# Altium PCB 175-00024_rev1, Backplane, 19-inch Rack_OLD.PcbDoc (part 3 of 3)
Units mil, origin at the board's own origin, x right, y up, seen from the top; angles counter-clockwise.
Board outline 8400 x 10183.07 mil, 7 copper layers (Top Layer (*.GTL), Mid-Layer 1, +24V, RTN, +12V, Signal GND, Bottom Layer); 183 components, 151 nets, 1419 pads, 357 vias.
Unrouted connection lines stored in the file: 135.
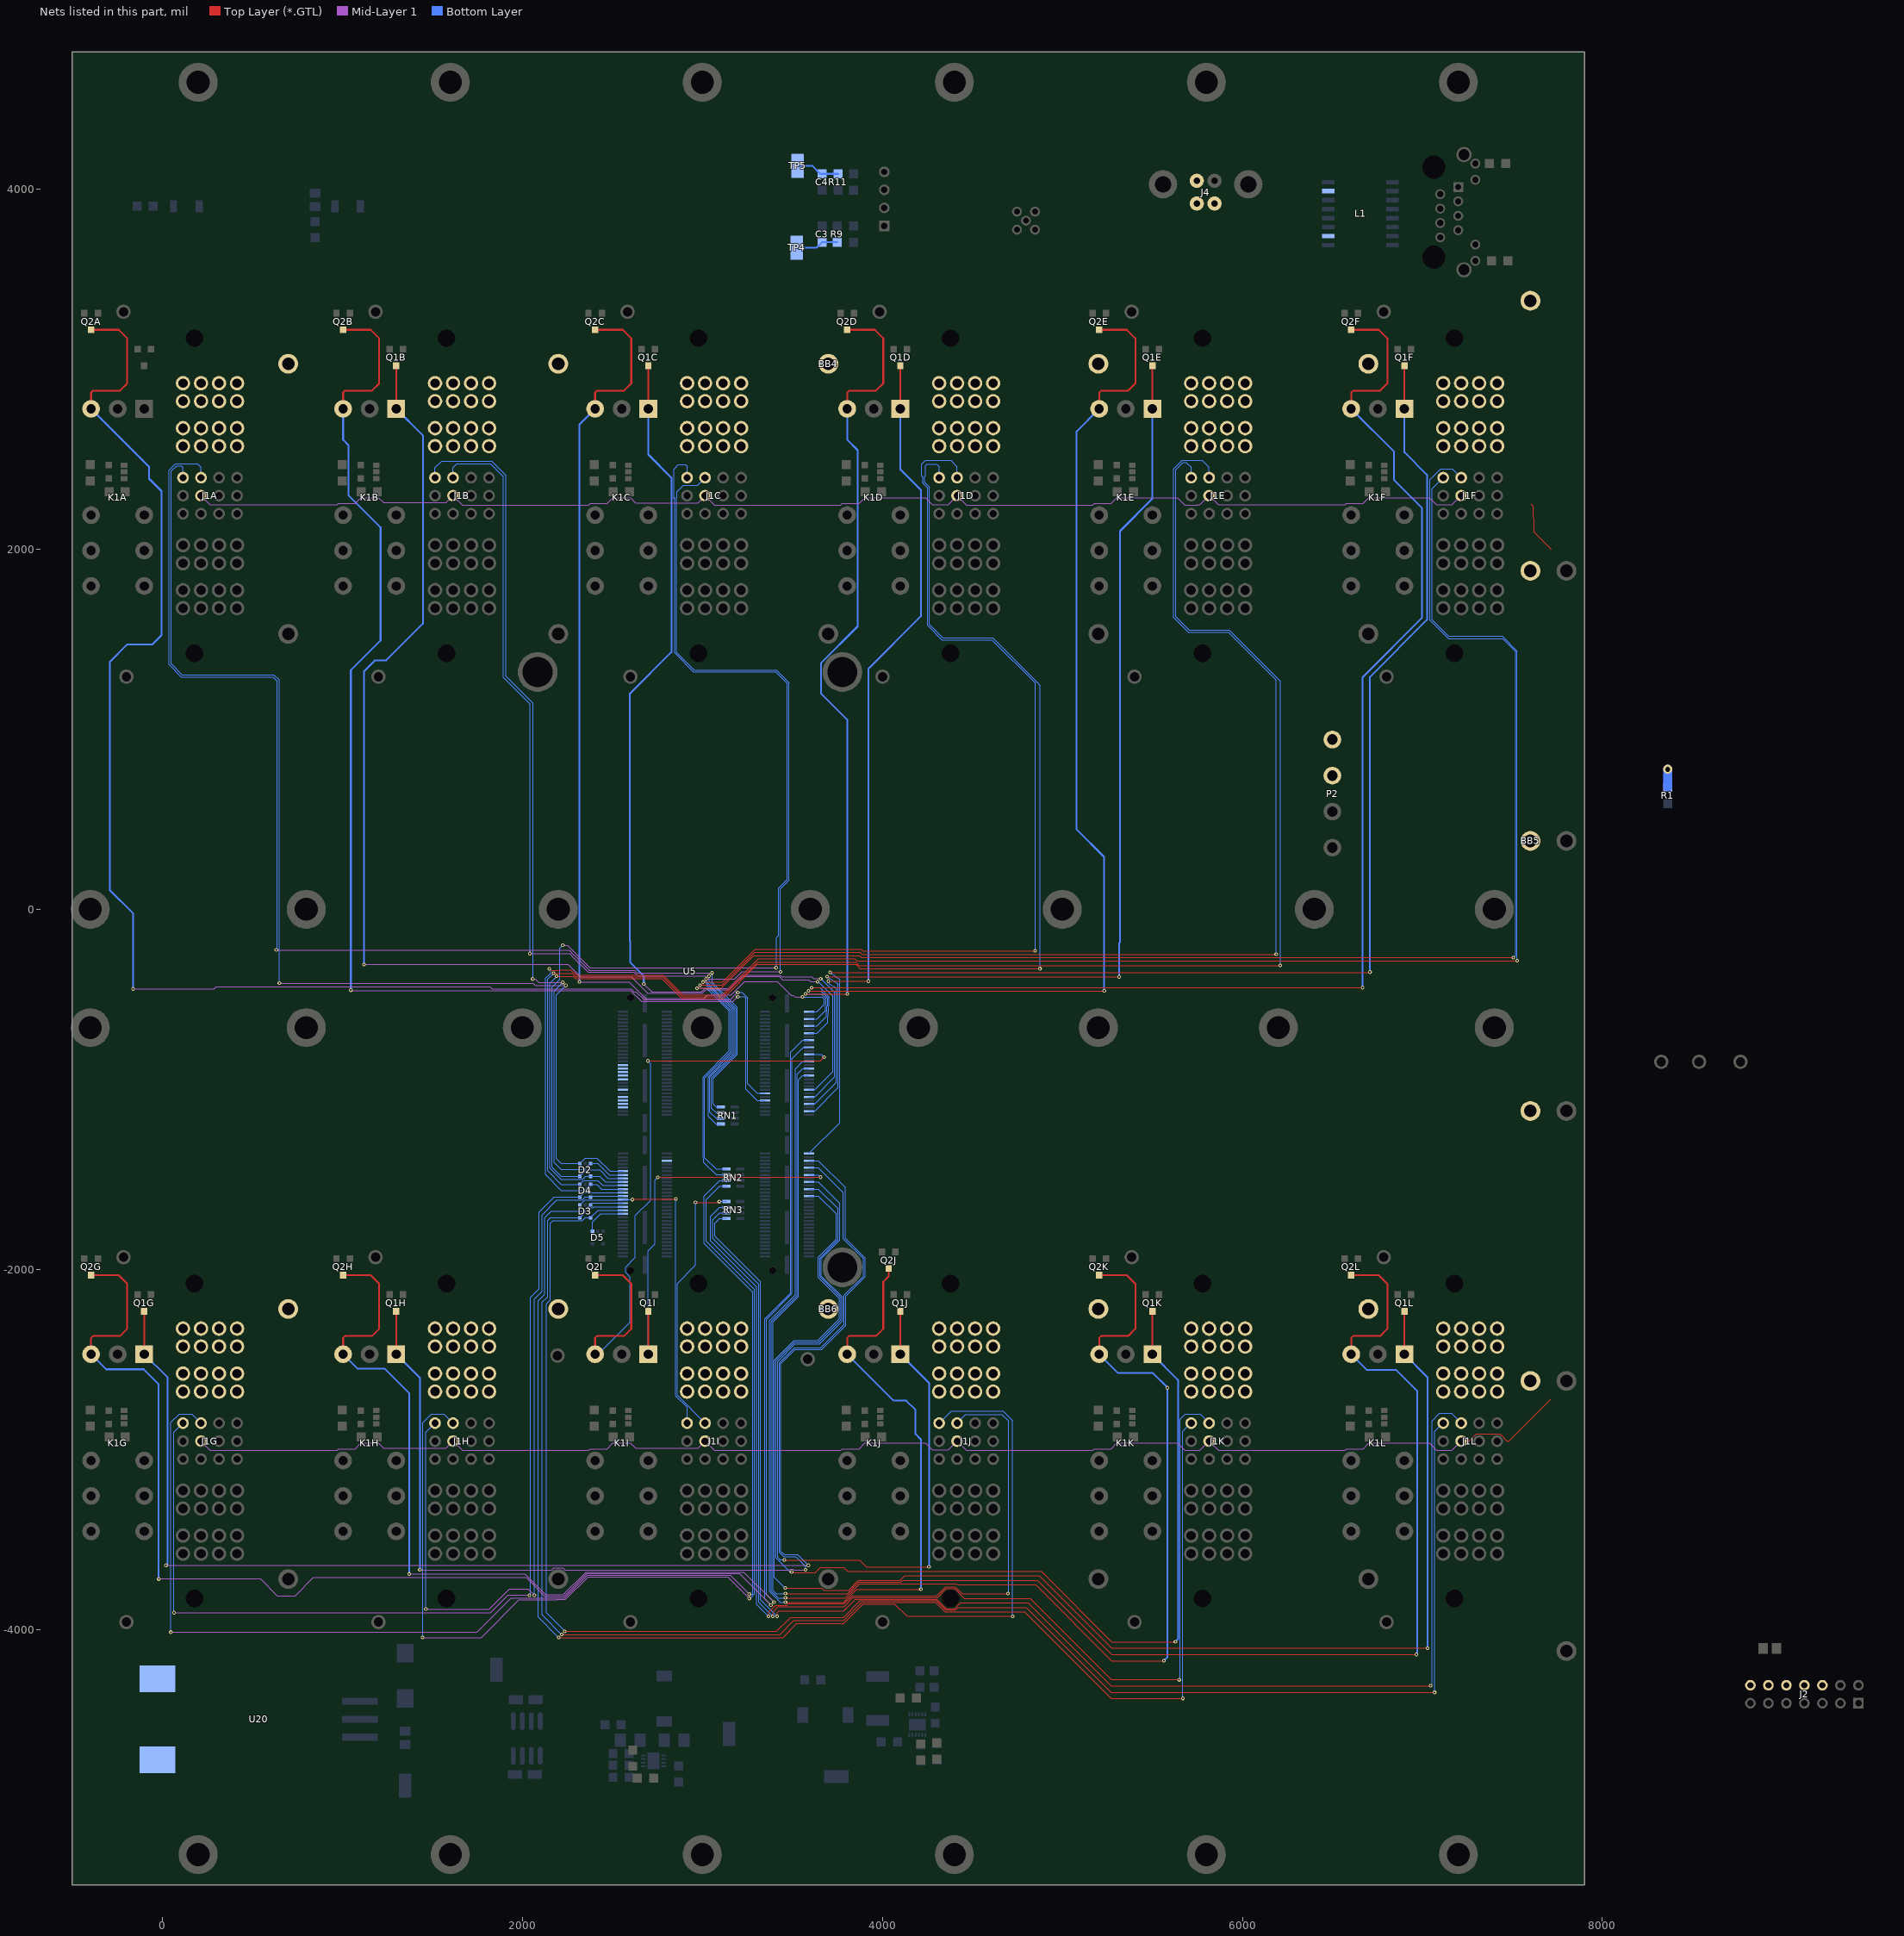
[diagram p8: the nets of this part, all layers, seen from the top]

## Via types
v1: diameter 20, hole 10, Top Layer (*.GTL) to Bottom Layer, 213 vias
v2: diameter 50, hole 28, Top Layer (*.GTL) to Bottom Layer, 87 vias
v3: diameter 24, hole 10, Top Layer (*.GTL) to Bottom Layer, 50 vias
v4: diameter 25.98, hole 12.99, Top Layer (*.GTL) to Bottom Layer, tented top, 4 vias
v5: diameter 30, hole 15, Top Layer (*.GTL) to Bottom Layer, 3 vias

## Nets (pads, with @x,y where several pads share a name; then routed paths per layer and width w, separated by ;. In a path a pad name is that pad's centre, name@x,y a point inside that pad or via, vN(x,y) a via of type N, cw(c..) or ccw(c..) an arc to the next point about the centre after c; other vN are vias at no path point) (continued)
PWR_OFF2: K1B.1 Q1B.3 U5.B46 | length 6906.3
  Top Layer (*.GTL) w10: K1B.1@1300,2779.92 Q1B.3@1300,3018.66
  Mid-Layer 1 w5: v1@1121,-306 2138.94,-306 2139.44,-305.5 2160.56,-305.5 2161.06,-306 2254.18,-306 2324.18,-376 2605.18,-376 2696.18,-467 2999.82,-467 3018.82,-448 3149.48,-448 3223.48,-374 3428.18,-374 3446.33,-392.15 3590.85,-392.15 3600.97,-402.26 v1(3641.24,-402.26)
  Bottom Layer w5: U5.B46@3592.59,-1002.72 3624,-1002.72 3725,-901.72 3725,-482.36 3644.9,-402.26 v1(3641.24,-402.26)
  Bottom Layer w10: v1(1121,-307) 1121,1321 1183,1383 1244,1383 1448,1587 1448,2631.92 K1B.1@1300,2779.92
PWR_OFF3: K1C.1 Q1C.3 U5.B50 | length 5430.4
  Top Layer (*.GTL) w10: K1C.1@2700,2779.92 Q1C.3@2700,3018.66
  Mid-Layer 1 w5: v1(2675,-415) 2717,-457 ; 2717,-458 2996.09,-458 3015.09,-439 3145.75,-439 3219.75,-365 3431.91,-365 3442.46,-375.54 3442.82,-375.18 3607.82,-375.18 3617.94,-385.29 v1(3658.21,-385.29)
  Mid-Layer 1 w10: v1@2675,-416.91 v1(2675,-415)
  Bottom Layer w5: U5.B50@3592.59,-1042.09 3624,-1042.09 3735,-931.09 3735,-462.09 v1(3658.21,-385.29)
  Bottom Layer w10: v1(2675,-415) 2675,-371 2600,-296 2600,-177 2598,-175 2598,1198 2829,1429 2829,2397 2700,2526 K1C.1@2700,2779.92
PWR_OFF4: K1D.1 Q1D.3 U5.B54 | length 4596.5
  Top Layer (*.GTL) w5: v1@3700,-398.32 v1@3923,-398.32
  Top Layer (*.GTL) w10: K1D.1@4100,2779.92 Q1D.3@4100,3018.66
  Bottom Layer w5: U5.B54@3592.59,-1081.46 3624,-1081.46 3745,-960.46 3745,-438.15 3704.14,-414.5 v1(3700,-399)
  Bottom Layer w10: v1(3923,-399) 3923,1336 4214,1627 4214,2330 4100,2444 K1D.1@4100,2779.92
PWR_OFF5: K1E.1 Q1E.3 U5.B58 | length 5958
  Top Layer (*.GTL) w5: v1(3693.15,-374.35) v1@5315,-374.35
  Top Layer (*.GTL) w10: K1E.1@5500,2779.92 Q1E.3@5500,3018.66
  Bottom Layer w5: U5.B58@3592.59,-1120.83 3624,-1120.83 3755,-989.83 3755,-414.21 v1(3693.15,-374.35)
  Bottom Layer w10: v1(5315,-375) 5315,-188.13 5320,-183.13 5320,2100 5500,2280 K1E.1@5500,2779.92
PWR_OFF6: K1F.1 Q1F.3 U5.B62 | length 7657.1
  Top Layer (*.GTL) w5: v1(3709.12,-350.38) v1@6709,-350.38
  Top Layer (*.GTL) w10: K1F.1@6900,2779.92 Q1F.3@6900,3018.66
  Bottom Layer w5: U5.B62@3592.59,-1357.05 3764,-1185.63 3764,-389.26 v1(3709.12,-350.38)
  Bottom Layer w10: v1(6709,-349) 6709,1291 7026,1608 7026,2413 6900,2539 K1F.1@6900,2779.92
PWR_OFF7: K1G.1 Q1G.3 U5.B66 | length 7830.7
  Top Layer (*.GTL) w10: K1G.1@-100.01,-2471.26 Q1G.3@-100.01,-2232.52
  Mid-Layer 1 w5: v1(21,-3644) v1(3589,-3644)
  Bottom Layer w5: v1(3589,-3644) 3529,-3584 3454,-3584 3437,-3567 3437,-2524 3516,-2445 3662.71,-2445 3797.5,-2310.21 3797.5,-2147.67 3904.15,-2041.02 3904.15,-1936.86 3794,-1826.71 3794,-1545.42 3645,-1396.42 U5.B66@3592.59,-1396.42
  Bottom Layer w10: K1G.1@-100.01,-2471.26 30,-2601.27 30,-3635 v1(21,-3644)
PWR_OFF8: K1H.1 Q1H.3 U5.B70 | length 6415.1
  Top Layer (*.GTL) w10: K1H.1@1299.99,-2471.26 Q1H.3@1299.99,-2232.52
  Mid-Layer 1 w5: v1(1431,-3669) 2164.1,-3669 2174.53,-3658.58 2225.47,-3658.58 2235.9,-3669 3484.67,-3669 3489.17,-3664.5 3502.83,-3664.5 3507.33,-3669 v1(3574,-3669)
  Bottom Layer w5: v1(3574,-3669) 3574,-3653.83 3572.5,-3652.33 3572.5,-3649.5 3520,-3597 3452,-3597 3428,-3573 3428,-2520.27 3513.27,-2435 3658.57,-2435 3788.5,-2305.07 3788.5,-2143.94 3895.15,-2037.29 3895.15,-1940.58 3784,-1829.43 3784,-1574.79 3645,-1435.79 U5.B70@3592.59,-1435.79
  Bottom Layer w10: K1H.1@1299.99,-2471.26 1432,-2603.27 1432,-3668 v1(1431,-3669)
PWR_OFF9: K1I.1 Q1I.3 U5.B74 | length 2218.9
  Top Layer (*.GTL) w5: v1(2753,-1489) 3657,-1489 v1(3658,-1488)
  Top Layer (*.GTL) w10: K1I.1@2699.99,-2471.26 Q1I.3@2699.99,-2232.52
  Bottom Layer w5: K1I.1@2699.99,-2471.26 2699.99,-1896.69 2737.5,-1859.17 2737.5,-1504.5 v1(2753,-1489) ; U5.B74@3592.59,-1475.16 3645,-1475.16 ; 3645.16,-1475.16 v1(3658,-1488)
PWR_OFF10: K1J.1 Q1J.3 U5.B78 | length 4853.6
  Top Layer (*.GTL) w5: v1(3456,-3614) 3874.09,-3614 3912.36,-3652.27 v1@4259,-3652.27
  Top Layer (*.GTL) w10: K1J.1@4099.99,-2471.26 Q1J.3@4099.99,-2232.52
  Bottom Layer w5: v1(3456,-3614) 3454,-3612 3432,-3612 3419,-3599 3419,-2512 3516,-2415 3650.28,-2415 3779.5,-2285.78 3779.5,-2155.11 3661.68,-2037.29 3661.68,-1940.58 3764,-1838.26 3764,-1633.53 3645,-1514.53 U5.B78@3592.59,-1514.53
  Bottom Layer w10: K1J.1@4099.99,-2471.26 4260,-2631.27 4260,-3651 v1(4259,-3652)
PWR_OFF11: K1K.1 Q1K.3 U5.B82 | length 6800.8
  Top Layer (*.GTL) w5: v1(3496,-3681) 3500.5,-3685.5 3626.5,-3685.5 3656,-3656 3785,-3656 3806.27,-3677.27 4882.54,-3677.27 5274.26,-4069 v1@5628,-4069
  Top Layer (*.GTL) w10: K1K.1@5499.99,-2471.26 Q1K.3@5499.99,-2232.52
  Bottom Layer w5: v1(3496,-3681) 3488.27,-3681 3410,-3602.73 3410,-2508.27 3513.27,-2405 3646.14,-2405 3770.5,-2280.64 3770.5,-2158.84 3652.68,-2041.02 3652.68,-1936.86 3754,-1835.53 3754,-1662.9 3645,-1553.9 U5.B82@3592.59,-1553.9
  Bottom Layer w10: K1K.1@5499.99,-2471.26 5643,-2614.27 5643,-4053 v1(5628,-4068)
PWR_OFF12: K1L.1 Q1L.3 U5.B86 | length 8309.1
  Top Layer (*.GTL) w5: v1(3461,-3770) 3662.95,-3770 3674.53,-3781.58 3812.78,-3781.58 3865.92,-3728.44 4099.38,-3728.44 4125.54,-3702.27 4872.18,-3702.27 5273.91,-4104 v1@7029,-4104
  Top Layer (*.GTL) w10: K1L.1@6899.99,-2471.26 Q1L.3@6899.99,-2232.52
  Bottom Layer w5: v1(3461,-3770) 3401,-3710 3401,-2504.54 3510.54,-2395 3642,-2395 3761.5,-2275.5 3761.5,-2162.57 3643.68,-2044.75 3643.68,-1933.13 3744,-1832.8 3744,-1692.27 3645,-1593.27 U5.B86@3592.59,-1593.27
  Bottom Layer w10: K1L.1@6899.99,-2471.26 7029,-2600.27 7029,-4103 v1(7028,-4104)
PWR_ON1: K1A.2 Q2A.3 U5.B47 | length 8496
  Top Layer (*.GTL) w10: K1A.2@-395.28,2779.92 -395.28,2870.29 -384.5,2881.06 -234.5,2881.06 -194.5,2921.06 -194.5,3171.06 -242.1,3218.66 Q2A.3@-395,3218.66
  Mid-Layer 1 w5: v1@-162,-442.48 288.29,-442.48 299.77,-431 1821.39,-431 1832.88,-442.48 2605.17,-442.48 2620.69,-458 2632,-458 2677,-503 3155.96,-503 v1@3189.96,-469 ; v1@3190,-469 v1(3197,-462)
  Bottom Layer w5: v1(3197,-462) 3221.73,-462 3251,-491.27 3251,-969.4 3304,-1022.4 U5.B47@3349.28,-1022.4
  Bottom Layer w10: K1A.2@-395.28,2779.92 -73,2457.65 -73,2392 -4,2323 -4,1522.6 -56.6,1470 -195.6,1470 -291,1374.6 -291,106 -161,-24 -161,-441 v1(-162,-442)
PWR_ON2: K1B.2 Q2B.3 U5.B51 | length 7037.2
  Top Layer (*.GTL) w10: K1B.2@1004.72,2779.92 1004.72,2870.29 1015.5,2881.06 1165.5,2881.06 1205.5,2921.06 1205.5,3171.06 1157.9,3218.66 Q2B.3@1005,3218.66
  Mid-Layer 1 w5: v1@1048,-451.48 2601.44,-451.48 2661.96,-512 3171,-512 v1(3197,-486)
  Bottom Layer w5: v1(3197,-486) 3233,-486 3241,-494 3241,-998.77 3304,-1061.77 U5.B51@3349.28,-1061.77
  Bottom Layer w10: K1B.2@1004.72,2779.92 1004.72,2608.28 1034,2579 1034,2300 1213,2121 1213,1493 1048,1328 v1(1048,-449)
PWR_ON3: K1C.2 Q2C.3 U5.B2 | length 5615.1
  Top Layer (*.GTL) w10: K1C.2@2404.72,2779.92 2404.72,2870.29 2415.5,2881.06 2565.5,2881.06 2605.5,2921.06 2605.5,3171.06 2557.9,3218.66 Q2C.3@2405,3218.66
  Mid-Layer 1 w5: v1@2313,-403 v1(2317,-403) 2594,-403 2685,-494 3011,-494 3030,-475 3160.67,-475 3234.67,-401 3417,-401 3493,-477 3506,-477 3516.12,-487.12 v1(3556.38,-487.12)
  Bottom Layer w5: v1(3556.38,-487.12) 3666.12,-487.12 3678,-499 3678,-527.65 3636,-569.65 U5.B2@3592.59,-569.65
  Bottom Layer w10: v1(2317,-403) 2317,-49.11 2317.27,-48.84 2317.27,48.57 2317,48.84 2317,2692.2 K1C.2@2404.72,2779.92
PWR_ON4: K1D.2 Q2D.3 U5.B6 | length 4735.2
  Top Layer (*.GTL) w5: v1(3573.35,-470.15) v1@3805,-470.15
  Top Layer (*.GTL) w10: K1D.2@3804.72,2779.92 3804.72,2870.29 3815.5,2881.06 3965.5,2881.06 4005.5,2921.06 4005.5,3171.06 3957.9,3218.66 Q2D.3@3805,3218.66
  Bottom Layer w5: v1(3573.35,-470.15) 3661.87,-470.15 3687,-495.27 3687,-531.37 3684,-534.37 3684,-561.02 3636,-609.02 U5.B6@3592.59,-609.02
  Bottom Layer w10: K1D.2@3804.72,2779.92 3804.72,2608.28 3862.94,2550.07 3862.94,1571.3 3659.18,1367.54 3659.18,1198.91 3804.72,1053.37 3804.72,-469.72 v1(3805,-470)
PWR_ON5: K1E.2 Q2E.3 U5.B10 | length 6119.5
  Top Layer (*.GTL) w5: v1(3590.32,-453.18) v1@5232,-453.18
  Top Layer (*.GTL) w10: K1E.2@5204.72,2779.92 5204.72,2870.29 5215.5,2881.06 5365.5,2881.06 5405.5,2921.06 5405.5,3171.06 5357.9,3218.66 Q2E.3@5205,3218.66
  Bottom Layer w5: v1(3590.32,-453.18) 3657.63,-453.18 3696,-491.54 3696,-535.1 3693,-538.1 3693,-564.74 3690,-567.74 3690,-594.39 3636,-648.39 U5.B10@3592.59,-648.39
  Bottom Layer w10: K1E.2@5204.72,2779.92 5079,2654.2 5079,444 5232,291 5232,-452 v1(5233,-453)
PWR_ON6: K1F.2 Q2F.3 U5.B14 | length 7749
  Top Layer (*.GTL) w5: v1(3607.29,-436.21) v1@6668,-436.21
  Top Layer (*.GTL) w10: K1F.2@6604.72,2779.92 6604.72,2870.29 6615.5,2881.06 6765.5,2881.06 6805.5,2921.06 6805.5,3171.06 6757.9,3218.66 Q2F.3@6605,3218.66
  Bottom Layer w5: U5.B14@3592.59,-687.76 3636,-687.76 3696,-627.76 3696,-601.11 3699,-598.11 3699,-571.47 3702,-568.47 3702,-541.83 3705,-538.83 3705,-487.82 3653.39,-436.21 v1(3607.29,-436.21)
  Bottom Layer w10: K1F.2@6604.72,2779.92 6843,2541.65 6843,2384 6998.5,2228.5 6998.5,1619.76 6668,1289.26 v1(6668,-435)
PWR_ON7: K1G.2 Q2G.3 U5.B18 | length 9232.5
  Top Layer (*.GTL) w10: K1G.2@-395.29,-2471.26 -395.29,-2380.89 -384.51,-2370.12 -234.51,-2370.12 -194.51,-2330.12 -194.51,-2080.12 -242.11,-2032.52 Q2G.3@-395.01,-2032.52
  Mid-Layer 1 w5: v1@-19,-3719 544.27,-3719 639.27,-3814 738,-3814 840,-3712 2021.27,-3712 2125.27,-3816 2232,-3816 2358,-3690 3206.06,-3690 v1(3381.03,-3864.97)
  Bottom Layer w5: v1(3381.03,-3864.97) 3347,-3830.94 3347,-2274 3490.03,-2130.97 3490.03,-795.09 3558,-727.13 U5.B18@3592.59,-727.13
  Bottom Layer w10: K1G.2@-395.29,-2471.26 -311.55,-2555 -103,-2555 -20,-2638 -20,-3719 v1(-19,-3720)
PWR_ON8: K1H.2 Q2H.3 U5.B22 | length 7656.4
  Top Layer (*.GTL) w10: K1H.2@1004.71,-2471.26 1004.71,-2380.89 1015.49,-2370.12 1165.49,-2370.12 1205.49,-2330.12 1205.49,-2080.12 1157.89,-2032.52 Q2H.3@1004.99,-2032.52
  Mid-Layer 1 w5: v1(1372,-3692) 2014,-3692 2129,-3807 2228.27,-3807 2354.27,-3681 3231,-3681 v1(3398,-3848)
  Bottom Layer w5: v1(3398,-3848) 3356,-3806 3356,-2277.73 3499.03,-2134.7 3499.03,-829.02 3558,-770.05 3558,-766.5 U5.B22@3592.59,-766.5
  Bottom Layer w10: K1H.2@1004.71,-2471.26 1085.45,-2552 1236,-2552 1373,-2689 1373,-3691 v1(1372,-3692)
PWR_ON9: K1I.2 Q2I.3 U5.B26 | length 3653.5
  Top Layer (*.GTL) w5: v1(2697,-842) 3655,-842 v1(3676,-821)
  Top Layer (*.GTL) w10: K1I.2@2404.71,-2471.26 2404.71,-2380.89 2415.49,-2370.12 2565.49,-2370.12 2605.49,-2330.12 2605.49,-2080.12 2557.89,-2032.52 Q2I.3@2404.99,-2032.52
  Bottom Layer w5: K1I.2@2404.71,-2471.26 2422.02,-2471.26 2598.5,-2294.78 2598.5,-2041.89 2573.88,-2017.27 2573.88,-1987.44 2628.28,-1933.04 2628.28,-1701.86 2712.5,-1617.64 2712.5,-857.5 v1(2697,-842) ; U5.B26@3592.59,-805.87 3660.87,-805.87 v1(3676,-821)
PWR_ON10: K1J.2 Q2J.3 U5.B30 | length 6128.5
  Top Layer (*.GTL) w5: v1(3462,-3849) 3785,-3849 3857,-3777 v1(4214,-3777) v1@4215,-3776
  Top Layer (*.GTL) w10: K1J.2@3804.71,-2471.26 3804.71,-2380.89 3815.49,-2370.12 3965.49,-2370.12 4005.49,-2330.12 4005.49,-2068.95 4035.5,-2038.94 Q2J.3@4035.5,-1995.2
  Bottom Layer w5: v1(3462,-3849) 3432.54,-3849 3374,-3790.46 3374,-2285.18 3517.03,-2142.15 3517.03,-886.2 3558,-845.24 U5.B30@3592.59,-845.24
  Bottom Layer w10: K1J.2@3804.71,-2471.26 4062.45,-2729 4133,-2729 4184,-2780 4184,-2914 4215,-2945 4215,-3776 v1(4214,-3777)
PWR_ON11: K1K.2 Q2K.3 U5.B34 | length 8181
  Top Layer (*.GTL) w5: v1(3462,-3825) 3794.82,-3825 3873.38,-3746.44 4412.67,-3746.44 4418.51,-3752.27 4851.47,-3752.27 5273.2,-4174 v1(5564,-4174)
  Top Layer (*.GTL) w10: K1K.2@5204.71,-2471.26 5204.71,-2380.89 5215.49,-2370.12 5365.49,-2370.12 5405.49,-2330.12 5405.49,-2080.12 5357.89,-2032.52 Q2K.3@5204.99,-2032.52
  Bottom Layer w5: v1(3462,-3825) 3421.27,-3825 3383,-3786.73 3383,-2288.91 3526.03,-2145.88 3526.03,-916.57 3558,-884.61 U5.B34@3592.59,-884.61
  Bottom Layer w10: K1K.2@5204.71,-2471.26 5309.45,-2576 5503,-2576 v1@5584,-2657 ; v1(5564,-4174) 5584,-4154 v1@5584,-2657 ; v1(5583,-2658) v1@5584,-2657
PWR_ON12: K1L.2 Q2L.3 U5.B38 | length 9448.6
  Top Layer (*.GTL) w5: v1(3462,-3801) 3806.09,-3801 3869.65,-3737.44 4103.11,-3737.44 4113.27,-3727.27 4861.83,-3727.27 5273.55,-4139 v1@6971,-4139
  Top Layer (*.GTL) w10: K1L.2@6604.71,-2471.26 6604.71,-2380.89 6615.49,-2370.12 6765.49,-2370.12 6805.49,-2330.12 6805.49,-2080.12 6757.89,-2032.52 Q2L.3@6604.99,-2032.52
  Bottom Layer w5: v1(3462,-3801) 3410,-3801 3392,-3783 3392,-2292.64 3535.03,-2149.61 3535.03,-946.94 3558,-923.98 U5.B38@3592.59,-923.98
  Bottom Layer w10: K1L.2@6604.71,-2471.26 6692.45,-2559 6855,-2559 6971,-2675 6971,-4135 v1(6967,-4139)
RTN: BB4.1 BB5.1 BB6.1 J1A.15 J1A.16 J1B.15 J1B.16 J1C.15 J1C.16 J1D.15 J1D.16 J1E.15 J1E.16 J1F.15 J1F.16 J1G.15 J1G.16 J1H.15 J1H.16 J1I.15 J1I.16 J1J.15 J1J.16 J1K.15 J1K.16 J1L.15 J1L.16 P2.3 P2.4 R1.1 | length 100
  Bottom Layer w50: R1.1@8363,677.52 v2(8363,777.52)
SILICON_SN: D5.1 J1A.6 J1B.6 J1C.6 J1D.6 J1E.6 J1F.6 J1G.6 J1H.6 J1I.6 J1J.6 J1K.6 J1L.6 U5.A95 | length 15880.5
  Top Layer (*.GTL) w5: J1L.6@7215.5,-2953.94 7260.35,-2953.94 7299.35,-2914.94 7431.65,-2914.94 7470.65,-2953.94 7480.54,-2953.94 7713.64,-2720.84 ; 7602.92,2252.44 7617.21,2238.15 7617.21,2175.73 7620.09,2172.85 7620.09,2094.16 7622.73,2091.52 7625.36,2088.88 7711,2003.25 7713.64,2000.61
  Mid-Layer 1 w5: J1G.6@215.5,-2953.94 266.22,-3004.66 970.34,-3004.66 977.91,-2997.1 1070.82,-2997.1 1103.15,-2964.76 1201.82,-2964.76 1229.72,-2992.66 1499.07,-2992.66 1499.35,-2992.94 1576.5,-2992.94 J1H.6@1615.5,-2953.94 1667.22,-3005.66 2369.34,-3005.66 2377.91,-2997.1 2470.82,-2997.1 2503.15,-2964.76 2601.82,-2964.76 2630.49,-2993.43 2976.01,-2993.43 J1I.6@3015.5,-2953.94 3067.22,-3005.66 3769.34,-3005.66 3777.91,-2997.1 3870.82,-2997.1 3903.15,-2964.76 4239.05,-2964.76 4277.95,-3003.66 4365.78,-3003.66 J1J.6@4415.5,-2953.94 4467.22,-3005.66 5169.34,-3005.66 5177.91,-2997.1 5270.82,-2997.1 5303.15,-2964.76 5639.05,-2964.76 5679.95,-3005.66 5751.05,-3005.66 5752.05,-3004.66 5764.78,-3004.66 J1K.6@5815.5,-2953.94 5866.22,-3004.66 6570.34,-3004.66 6577.91,-2997.1 6670.82,-2997.1 6703.15,-2964.76 7039.05,-2964.76 7078.95,-3004.66 7164.78,-3004.66 J1L.6@7215.5,-2953.94 ; J1A.6@215.51,2297.24 266.24,2246.52 970.36,2246.52 977.92,2254.08 1070.83,2254.08 1103.17,2286.42 1201.83,2286.42 1229.74,2258.52 1499.08,2258.52 1499.36,2258.24 1576.51,2258.24 J1B.6@1615.51,2297.24 1667.24,2245.52 2369.36,2245.52 2377.92,2254.08 2470.83,2254.08 2503.17,2286.42 2601.83,2286.42 2630.5,2257.76 2976.02,2257.76 J1C.6@3015.51,2297.24 3067.24,2245.52 3769.36,2245.52 3777.92,2254.08 3870.83,2254.08 3903.17,2286.42 4239.06,2286.42 4277.96,2247.52 4365.79,2247.52 J1D.6@4415.51,2297.24 4467.24,2245.52 5169.36,2245.52 5177.92,2254.08 5270.83,2254.08 5303.17,2286.42 5639.06,2286.42 5679.96,2245.52 5751.06,2245.52 5752.06,2246.52 5764.79,2246.52 J1E.6@5815.51,2297.24 5866.24,2246.52 6570.36,2246.52 6577.92,2254.08 6670.83,2254.08 6703.17,2286.42 7039.06,2286.42 7078.96,2246.52 7164.79,2246.52 J1F.6@7215.51,2297.24
  Bottom Layer w5: D5.1@2390,-1787.48 2390,-1737.48 2435.79,-1691.69 U5.A95@2559.12,-1691.69
SUPPORT: U20.0
TCK: J2.8 U5.A55
TDI: J2.12 U5.A49
TDO: J2.14 U5.A53
TEMP_INLET: C3.2 R9.1 TP4.1 U5.A37 | length 237.4
  Bottom Layer w10: TP4.1@3525,3675 3635,3675 C3.2@3665,3705 R9.1@3750,3705
TEMP_OUTLET: C4.2 R11.1 TP5.1 U5.A39 | length 243.6
  Bottom Layer w10: TP5.1@3530,4130 3610,4130 3655,4085 C4.2@3665,4085 R11.1@3755,4085
TMS: J2.6 U5.A51
TRST: J2.10 U5.A45
USB_D+: J4.3 U5.A35
USB_D-: J4.2 U5.A33
USB_VBUS: J4.1 U5.A31
VA25: L1.10 L1.15 U5.A66
~CARD_PRESENT1: J1A.10 RN1.7 | length 6840.3
  Mid-Layer 1 w5: v1(634,-226) 2259.91,-226 2285.94,-252.03 2289.46,-255.54 2373.91,-340 2624.46,-340 2637.85,-353.39 v1(3054.61,-353.39)
  Bottom Layer w5: J1A.10@215.51,2397.24 215.51,2456 196.51,2475 75.03,2475 38,2437.97 38,1359.03 106.03,1291 615,1291 639,1267 639,-223 636,-226 v1(634,-226) ; v1(3054.61,-353.39) 3054.61,-406.42 3187,-538.82 3189.64,-541.45 3192.27,-544.09 3194.91,-546.72 3194.91,-806.09 3192.27,-808.73 3189.64,-811.36 3187,-814 3060,-941 3060,-1081.99 3076,-1097.99 RN1.7@3103.94,-1097.99
~CARD_PRESENT2: J1B.10 RN1.5 | length 5047.3
  Mid-Layer 1 w5: v1@2043,-247 2263.94,-247 2280.97,-264.03 2365.94,-349 2620.73,-349 2642.09,-370.36 v1(3037.64,-370.36)
  Bottom Layer w5: J1B.10@1615.51,2397.24 1615.51,2453 1637.51,2475 1824,2475 1895,2404 1895,1287.79 2044,1138.79 2044,-245 2043,-246 v1(2042,-246) ; v1(3037.64,-370.36) 3037.64,-402.18 3180.64,-545.18 3183.27,-547.82 3185.91,-550.45 3185.91,-802.36 3183.27,-805 3180.64,-807.64 3051,-937.27 3051,-1104.49 3076,-1129.49 RN1.5@3103.94,-1129.49
~CARD_PRESENT3: J1C.10 RN1.3 | length 4767
  Mid-Layer 1 w5: v1(3020.67,-387.33) 3180.67,-387.33 3221,-347 v1(3434,-347)
  Bottom Layer w5: J1C.10@3015.51,2397.24 2973.27,2355 2896,2355 2860,2319 2860,2288 2856.5,2284.5 2856.5,1427.5 2955,1329 3411.14,1329 3478.07,1262.07 3481,1259.14 3481,160.86 3478.07,157.93 3434,113.86 v1(3434,-347) ; v1(3020.67,-387.33) 3020.67,-397.94 3174.27,-551.54 3176.91,-554.18 3176.91,-798.64 3174.27,-801.27 3042,-933.54 3042,-1126.98 3076,-1160.98 RN1.3@3103.94,-1160.98
~CARD_PRESENT4: J1D.10 RN1.1 | length 6295.3
  Top Layer (*.GTL) w5: v1(3003.7,-404.3) 3113.7,-404.3 3295,-223 3883.84,-223 3892.84,-232 v1@4849,-232
  Bottom Layer w5: v1(3003.7,-404.3) 3014.3,-404.3 3167.91,-557.91 3167.91,-794.91 3033,-929.82 3033,-1149.48 3076,-1192.48 RN1.1@3103.94,-1192.48 ; J1D.10@4415.51,2397.24 4415.51,2459 4381.51,2493 4239.3,2493 4219,2472.7 4219,2407 4225,2401 4225,2366.86 4251,2340.86 4251,1577.86 4331.86,1497 4608,1497 4849,1256 v1(4849,-231)
~CARD_PRESENT5: J1E.10 RN2.7 | length 7892.3
  Top Layer (*.GTL) w5: v1(2986.73,-421.27) 3109.45,-421.27 3292.73,-238 3875.57,-238 3887.57,-250 v1(6188,-250)
  Bottom Layer w5: v1(2986.73,-421.27) 3018.55,-421.27 3158.91,-561.64 3158.91,-791.18 3013,-937.09 3013,-1379.99 3076,-1442.99 RN2.7@3133.94,-1442.99 ; J1E.10@5815.51,2397.24 5815.51,2456 5776.51,2495 5667.03,2495 5619,2446.97 5619,1620.03 5699.03,1540 5921,1540 6188,1273 v1(6188,-250)
~CARD_PRESENT6: J1F.10 RN2.5 | length 9154.9
  Top Layer (*.GTL) w5: v1(2969.76,-438.24) 3105.21,-438.24 3284.46,-259 3873.3,-259 3882.3,-268 v1(7505,-268)
  Bottom Layer w5: v1(2969.76,-438.24) 3022.79,-438.24 3149.91,-565.36 3149.91,-787.45 3004,-933.36 3004,-1383.72 3007,-1386.72 3007,-1405.49 3076,-1474.49 RN2.5@3133.94,-1474.49 ; J1F.10@7215.51,2397.24 7166.76,2446 7101,2446 7041,2386 7041,1606 7145,1502 7445.27,1502 7517,1430.27 7517,-256 v1(7505,-268)
~CARD_PRESENT7: J1G.10 RN2.3 | length 7261.1
  Mid-Layer 1 w5: v1(48,-4015) 1749,-4015 1937.5,-3826.5 2073.83,-3826.5 2075.33,-3825 2235.73,-3825 2361.73,-3699 3156,-3699 v1(3261,-3804)
  Bottom Layer w5: v1(48,-4015) 48.5,-4014.5 48.5,-2850.5 95,-2804 165.56,-2804 J1G.10@215.5,-2853.94 ; RN2.3@3133.94,-1505.98 3095,-1505.98 3009,-1591.98 3009,-1856.82 3280,-2127.82 3280,-3576 3280,-3801 3277,-3804 v1(3261,-3804)
~CARD_PRESENT8: J1H.10 RN2.1 | length 5893.3
  Mid-Layer 1 w5: v1(1447,-4045) 1772.44,-4045 1981.94,-3835.5 2193.5,-3835.5 2195,-3834 2239.46,-3834 2365.46,-3708 3141,-3708 v1(3261,-3828)
  Bottom Layer w5: v1(1447,-4045) 1447.5,-4044.5 1447.5,-2851.5 1496,-2803 1564.56,-2803 J1H.10@1615.5,-2853.94 ; RN2.1@3133.94,-1537.48 3095,-1537.48 3021,-1611.48 3021,-1843.37 3291,-2113.37 3291,-3576 3291,-3802.73 3265.73,-3828 v1(3261,-3828)
~CARD_PRESENT9: J1I.10 RN3.7 | length 1504.4
  Top Layer (*.GTL) w5: v1(2962,-1628) 3090,-1628 v1(3094,-1624)
  Bottom Layer w5: v1(2962,-1628) 2962,-1977 2861,-2078 2861,-2699.44 J1I.10@3015.5,-2853.94 ; v1@3095,-1622.99 RN3.7@3133.94,-1622.99
~CARD_PRESENT10: J1J.10 RN3.5 | length 5177.4
  Top Layer (*.GTL) w5: v1(3368,-3928) 3368,-3904 3406.5,-3865.5 3468.83,-3865.5 3476.33,-3858 3788.73,-3858 3832.73,-3814 4302.22,-3814 4351.78,-3764.44 4405.22,-3764.44 4443.05,-3802.27 v1@4701,-3802.27
  Bottom Layer w5: RN3.5@3133.94,-1654.49 3095,-1654.49 3045,-1704.49 3045,-1841.91 3302,-2098.91 3302,-3862 v1(3368,-3928) ; J1J.10@4415.5,-2853.94 4463.44,-2806 4664,-2806 4701,-2843 4701,-3798 v1(4698,-3801)
~CARD_PRESENT11: J1K.10 RN3.3 | length 6622.9
  Top Layer (*.GTL) w5: v1(3392,-3928) 3392,-3904 3421.5,-3874.5 3472.56,-3874.5 3474.06,-3873 3786.46,-3873 3836.46,-3823 4305.95,-3823 4355.51,-3773.44 4401.49,-3773.44 4455.32,-3827.27 4820.4,-3827.27 5272.13,-4279 v1@5649,-4279
  Bottom Layer w5: RN3.3@3133.94,-1685.98 3095,-1685.98 3057,-1723.98 3057,-1828.46 3313,-2084.46 3313,-3849 v1(3392,-3928) ; v1(5649,-4280) 5655,-4274 5655,-2832 5682.56,-2804.44 5766,-2804.44 J1K.10@5815.5,-2853.94
~CARD_PRESENT12: J1L.10 RN3.1 | length 7989.6
  Top Layer (*.GTL) w5: v1(3416,-3928) 3416,-3904 3423,-3897 3785,-3897 3850,-3832 4303.07,-3832 4355.51,-3884.44 4401.49,-3884.44 4433.65,-3852.27 4810.05,-3852.27 5271.78,-4314 v1@7045,-4314
  Bottom Layer w5: RN3.1@3133.94,-1717.48 3095,-1717.48 3069,-1743.48 3069,-1815 3324,-2070 3324,-3836 v1(3416,-3928) ; v1(7045,-4313) 7053,-4305 7053,-2842 7095,-2800 7161.56,-2800 J1L.10@7215.5,-2853.94
~CS_SLOT1: D2.1 J1A.9 U5.A71 | length 6534.5
  Mid-Layer 1 w5: v1(651,-410) 2060.12,-410 2073.12,-423 v1(2242,-423)
  Bottom Layer w5: J1A.9@115.51,2397.24 115.51,2456 108.51,2463 80,2463 50,2433 50,1364 111,1303 619.97,1303 647.49,1275.49 651,1271.97 v1(651,-410) ; v1(2242,-423) 2189,-476 2189,-1385.48 2216,-1412.48 D2.1@2320,-1412.48 2350,-1382.48 2415,-1382.48 2487.99,-1455.47 U5.A71@2559.12,-1455.47
~CS_SLOT2: D2.3 J1B.9 U5.A73 | length 4991.8
  Mid-Layer 1 w5: v1(2058,-387) 2059,-388 2072.06,-388 2090.09,-406.03 v1(2225.03,-406.03)
  Bottom Layer w5: J1B.9@1515.51,2397.24 1515.51,2453 1552.51,2490 1830.21,2490 1910,2410.21 1910,1294 2059,1145 2059,-386 v1(2058,-387) ; v1(2225.03,-406.03) 2177,-454.06 2177,-1406.98 2216,-1445.98 2344.64,-1445.98 2378.14,-1412.48 D2.3@2379.06,-1412.48 2420,-1412.48 2482.68,-1475.16 U5.A73@2559.12,-1475.16
~CS_SLOT3: D2.5 J1C.9 U5.A75 | length 6421.8
  Mid-Layer 1 w5: v1(2225,-200) 2252,-200 2377,-325 v1(3410,-325)
  Bottom Layer w5: v1(2225,-200) 2208.06,-216.94 2208.06,-389.06 2165,-432.12 2165,-1432.35 2216,-1483.35 D2.5@2320,-1483.35 2355.87,-1447.48 2430,-1447.48 2477.36,-1494.84 U5.A75@2559.12,-1494.84 ; 2842,2282 2842,2288 ; J1C.9@2915.51,2397.24 2915.51,2459.49 2906,2469 2867,2469 2842,2444 2842,2288 ; v1(3410,-325) 3412,-323 3412,-157 3424,-145 3424,118 3471,165 3471,1255 3407,1319 2950.86,1319 2846.5,1423.36 2846.5,2283.5 2842,2288
~CS_SLOT4: D2.4 J1D.9 U5.A77 | length 7724.4
  Top Layer (*.GTL) w5: v1(2191.09,-372.09) 2243.91,-372.09 2244,-372 2284,-372 2296.27,-384.27 2775.82,-384.27 2885.54,-494 3117.46,-494 3304.46,-307 3854,-307 3877,-330 v1(4876,-330)
  Bottom Layer w5: v1(2191.09,-372.09) 2153,-410.18 2153,-1437.32 2211.03,-1495.35 2211.66,-1495.35 2216,-1499.69 2335.06,-1499.69 2351.41,-1483.35 D2.4@2379.06,-1483.35 2430.87,-1483.35 2462.05,-1514.53 U5.A77@2559.12,-1514.53 ; J1D.9@4315.51,2397.24 4315.51,2459 4302.51,2472 4248,2472 4240,2464 4240,2407 4235,2402 4235,2371 4261,2345 4261,1582 4336,1507 4612.14,1507 4856.07,1263.07 4876,1243.14 v1(4876,-330)
~CS_SLOT5: D4.1 J1E.9 U5.A79 | length 9088.1
  Top Layer (*.GTL) w5: v1(2174.12,-355.12) 2226.94,-355.12 2227.03,-355.03 2276.93,-355.03 2284.9,-363 2287.73,-363 2300,-375.27 2779.54,-375.27 2889.27,-485 3113.73,-485 3305.73,-293 3852.73,-293 3871.73,-312 v1(6211,-312)
  Bottom Layer w5: 2138,-1116 2141,-1113 ; v1(2174.12,-355.12) 2141,-388.24 2141,-1113 ; U5.A79@2559.12,-1534.21 2446.73,-1534.21 2420,-1507.48 2340,-1507.48 D4.1@2320,-1527.48 2216,-1527.48 2141,-1452.48 2141,-1113 ; J1E.9@5694,2418.76 J1E.9@5715.51,2397.24 5715.51,2456 5688.51,2483 5672,2483 5631,2442 5631,1625 5704,1552 5925.97,1552 6196.49,1281.49 6211,1266.97 v1(6211,-312)
~CS_SLOT6: D4.3 J1F.9 U5.A81 | length 10252.2
  Top Layer (*.GTL) w5: v1(2150,-331) 2157.15,-338.15 2209.97,-338.15 2210.06,-338.06 2269.86,-338.06 2277.83,-346.03 2280.66,-346.03 2288.63,-354 2291.46,-354 2303.73,-366.27 2783.27,-366.27 2893,-476 3110,-476 3311,-275 3847.46,-275 3858.48,-286.02 v1(7526,-286)
  Bottom Layer w5: v1(2150,-331) 2157.15,-338.15 2157.15,-355.12 2129,-383.26 2129,-1473.98 2216,-1560.98 2342.94,-1560.98 2376.44,-1527.48 D4.3@2379.06,-1527.48 2415,-1527.48 2441.42,-1553.9 U5.A81@2559.12,-1553.9 ; J1F.9@7115.51,2397.24 7053,2334.73 7053,1609 7145,1517 7443,1517 7526,1434 v1(7526,-286)
~CS_SLOT7: D4.5 J1G.9 U5.A83 | length 5750.1
  Mid-Layer 1 w5: v1(65,-3907) 1824,-3907 1921,-3810 v1(2039,-3810)
  Bottom Layer w5: v1(65,-3907) 64,-3906 64,-2905.44 J1G.9@115.5,-2853.94 ; v1(2039,-3810) 2045,-3804 2045,-3694 2045,-2155.55 2093.77,-2106.77 2093.77,-1681.77 2177.2,-1598.35 D4.5@2320,-1598.35 2344.76,-1573.58 U5.A83@2559.12,-1573.58
~CS_SLOT8: D4.4 J1H.9 U5.A85 | length 4341.8
  Mid-Layer 1 w5: v1(1464,-3887) 1816,-3887 1928.5,-3774.5 2031.5,-3774.5 v1(2067,-3810)
  Bottom Layer w5: v1(1464,-3887) 1464,-2905.44 J1H.9@1515.5,-2853.94 ; v1(2067,-3810) 2067,-3694 2067,-2164.66 2109.33,-2122.33 2109.33,-1697.33 2191.97,-1614.69 2332.53,-1614.69 2348.88,-1598.35 D4.4@2379.06,-1598.35 2384.13,-1593.27 U5.A85@2559.12,-1593.27
~CS_SLOT9: D3.1 J1I.9 U5.A87 | length 1819.9
  Top Layer (*.GTL) w5: v1(2612,-1612) 2615,-1609 v1(2854,-1609)
  Bottom Layer w5: D3.1@2320,-1642.48 2347.79,-1614.69 2557.39,-1614.69 U5.A87@2559.12,-1612.95 2560.07,-1612 v1(2612,-1612) ; v1(2854,-1609) 2852,-1611 2852,-2703.16 2915.5,-2766.66 J1I.9@2915.5,-2853.94
~CS_SLOT10: D3.3 J1J.9 U5.A89 | length 7033.6
  Top Layer (*.GTL) w5: v1(2202.06,-4044.94) 3446.94,-4044.94 3524.94,-3966.94 3785,-3966.94 3892.94,-3859 4068.46,-3859 4136.73,-3927.27 v1@4724,-3927.27
  Bottom Layer w5: v1(2202.06,-4044.94) 2089,-3931.88 2089,-2173.77 2124.89,-2137.89 2124.89,-1712.89 2159.79,-1677.98 2340.94,-1677.98 2376.44,-1642.48 D3.3@2379.06,-1642.48 2388.9,-1632.64 U5.A89@2559.12,-1632.64 ; J1J.9@4315.5,-2853.94 4382.44,-2787 4671,-2787 4723,-2839 4723,-3926 v1(4724,-3927)
~CS_SLOT11: D3.5 J1K.9 U5.A91 | length 8100
  Top Layer (*.GTL) w5: v1(2219.03,-4027.97) 3429.97,-4027.97 3507.97,-3949.97 3785,-3949.97 3884.97,-3850 4295.62,-3850 4348.06,-3902.44 4408.94,-3902.44 4409.11,-3902.27 4789.34,-3902.27 5271.07,-4384 v1@5669,-4384
  Bottom Layer w5: v1(2219.03,-4027.97) 2111,-3919.94 2111,-2182.89 2140.44,-2153.44 2140.44,-1728.44 2155.54,-1713.35 D3.5@2320,-1713.35 2374.52,-1658.82 2391.59,-1658.82 2398.09,-1652.32 U5.A91@2559.12,-1652.32 ; v1(5669,-4383) 5669,-2900.44 J1K.9@5715.5,-2853.94
~CS_SLOT12: D3.4 J1L.9 U5.A93 | length 9395.1
  Top Layer (*.GTL) w5: v1(2236,-4011) 3413,-4011 3491,-3933 3785,-3933 3877,-3841 4299.35,-3841 4351.78,-3893.44 4405.22,-3893.44 4421.38,-3877.27 4799.69,-3877.27 5271.42,-4349 v1@7069,-4349
  Bottom Layer w5: v1(2236,-4011) 2133,-3908 2133,-2192 2156,-2169 2156,-1744 2170.31,-1729.69 2332.53,-1729.69 2348.88,-1713.35 D3.4@2379.06,-1713.35 2420.39,-1672.01 U5.A93@2559.12,-1672.01 ; v1(7068,-4350) 7069,-4349 7069,-2900.44 J1L.9@7115.5,-2853.94
pads on no net: D5.5 J1A.0 J1A.3 J1A.4 J1A.7 J1A.8 J1B.0 J1B.3 J1B.4 J1B.7 J1B.8 J1C.0 J1C.3 J1C.4 J1C.7 J1C.8 J1D.0 J1D.3 J1D.4 J1D.7 J1D.8 J1E.0 J1E.3 J1E.4 J1E.7 J1E.8 J1F.0 J1F.3 J1F.4 J1F.7 J1F.8 J1G.0 J1G.3 J1G.4 J1G.7 J1G.8 J1H.0 J1H.3 J1H.4 J1H.7 J1H.8 J1I.0 J1I.3 J1I.4 J1I.7 J1I.8 J1J.0 J1J.3 J1J.4 J1J.7 J1J.8 J1K.0 J1K.3 J1K.4 J1K.7 J1K.8 J1L.0 J1L.3 J1L.4 J1L.7 J1L.8 J2.3 J3.4 J3.5 J3.7 J3.8 J3.MH1 J3.MH2 K1A.12 K1B.12 K1C.12 K1D.12 K1E.12 K1F.12 K1G.12 K1H.12 K1I.12 K1J.12 K1K.12 K1L.12 L1.2 L1.4 L1.5 L1.7 L1.12 L1.13 U5.0 U5.1 U5.A2 U5.A4 U5.A6 U5.A8 U5.A10 U5.A12 U5.A14 U5.A16 U5.A18 U5.A20 U5.A22 U5.A24 U5.A26 U5.A28 U5.A30 U5.A32 U5.A34 U5.A36 U5.A38 U5.A40 U5.A41 U5.A42 U5.A43 U5.A44 U5.A46 U5.A48 U5.A50 U5.A52 U5.A54 U5.A56 U5.A57 U5.A58 U5.A59 U5.A60 U5.A61 U5.A62 U5.A63 U5.A64 U5.A65 U5.A67 U5.A69 U5.A72 U5.A74 U5.A76 U5.A78 U5.A80 U5.A82 U5.A84 U5.A86 U5.A88 U5.A90 U5.A92 U5.A94 U5.A96 U5.A97 U5.A98 U5.A99 U5.A100 U5.A101 U5.A102 U5.A104 U5.A106 U5.A107 U5.A108 U5.A110 U5.A112 U5.A113 U5.A114 U5.A115 U5.A116 U5.A117 U5.A118 U5.A119 U5.A120 U5.B1 U5.B3 U5.B5 U5.B7 U5.B9 U5.B11 U5.B13 U5.B15 U5.B17 U5.B19 U5.B21 U5.B23 U5.B25 U5.B27 U5.B29 U5.B31 U5.B33 U5.B35 U5.B37 U5.B39 U5.B41 U5.B43 U5.B45 U5.B69 U5.B90 U5.B91 U5.B92 U5.B93 U5.B94 U5.B95 U5.B96 U5.B97 U5.B98 U5.B99 U5.B100 U5.B101 U5.B102 U5.B103 U5.B104 U5.B105 U5.B106 U5.B107 U5.B108 U5.B109 U5.B110 U5.B111 U5.B112 U5.B113 U5.B114 U5.B115 U5.B116 U5.B117 U5.B118 U5.B119 U5.B120 U21.3 U21.11 U22.1 U22.6 U22.7 U23.3 U23.4
copper on no net:
  other v3: 3643.8,-4640.73 3708.8,-4640.73 3568.8,-4635.73 3708.8,-4535.73 3708.8,-4480.73 3708.8,-4430.73 3708.8,-4380.73 3583.8,-4375.73 3553.8,-4210.73 3608.8,-4210.73

## Polygon pours and split planes (outlines as drawn)
+24V on Bottom Layer "Bottom Layer-AGND" (solid, pour order 1008): 2772.98,-4727.08 2772.98,-4713.08 2772.98,-4689.08 2773.98,-4688.08 2861.98,-4688.08 2861.98,-4554.08 2975.98,-4554.08 2975.98,-4728.08 2974.98,-4727.08 2772.98,-4727.08
NetL3_1 on Bottom Layer "Bottom Layer-AGND" (solid, pour order 1007): 2770.98,-4701.08 2770.98,-4561.08 2767.98,-4558.08 2727.98,-4558.08 2727.98,-4473.08 2872.98,-4473.08 2872.98,-4705.08 2774.98,-4705.08 2770.98,-4701.08
GND on Bottom Layer "Bottom Layer-AGND" (solid, pour order 1006): 2698.98,-4703.12 2605.98,-4703.12 2605.98,-4566.04 2606.98,-4565.08 2832.98,-4565.08 2832.98,-4659.03 2760.98,-4659.03 2760.98,-4704.08 2699.98,-4704.08 2698.98,-4703.12
+12V on Bottom Layer "Bottom Layer-AGND" (solid, pour order 1009): 2475.98,-4719.54 2475.98,-4213.08 2874.98,-4213.08 2872.9,-4215.35 2872.9,-4724.08 2480.15,-4724.08 2475.98,-4719.54
NetD1_1 on Bottom Layer "Bottom Layer-AGND" (solid, pour order 1000): 4153.8,-4485.73 4122.37,-4485.73 4122.37,-4575.73 3889.8,-4575.73 3889.8,-4440.73 4153.8,-4440.73 4153.8,-4485.73
NetC11_1 on Bottom Layer "Top Layer (*.GTL)-No Net" (solid, pour order 15): 4153.8,-4202.76 4174.8,-4202.76 4174.8,-4487.76 4172.78,-4485.73 4153.8,-4485.73 4153.8,-4202.76
no net on Bottom Layer "Top Layer (*.GTL)-No Net" (solid, pour order 17): 3774.8,-4682.76 3769.8,-4677.76 3769.8,-4182.76 3509.8,-4182.76 3509.8,-4682.76 3769.8,-4682.76
NetC11_1 on Bottom Layer "Top Layer (*.GTL)-No Net" (solid, pour order 13): 4029.12,-4672.76 4029.12,-4568.5 3899.45,-4568.5 3899.45,-4432.97 4143.83,-4432.97 4148.81,-4438.18 4153.8,-4432.97 4153.8,-4182.76 3779.75,-4182.76 3759.8,-4182.76 3759.8,-4672.76 4029.12,-4672.76
no net on Bottom Layer "Bottom Layer-AGND" (solid, pour order 1004): 3509.8,-4665.73 3509.8,-4715.73 4172.63,-4715.73 4172.63,-4578.73 4173.8,-4577.73 4172.63,-4578.73 4160.87,-4578.73 4160.87,-4665.73 3509.8,-4665.73
GND on Bottom Layer "Bottom Layer-AGND" (solid, pour order 1002): 4233.8,-4560.73 4233.8,-4485.73 4328.8,-4485.73 4328.8,-4560.73 4233.8,-4560.73
+24V on Bottom Layer "Bottom Layer-AGND" (solid, pour order 1001): 4233.8,-4485.73 4328.8,-4485.73 4328.8,-4370.73 4233.8,-4370.73 4233.8,-4485.73
no net on Top Layer (*.GTL) "Top Layer (*.GTL)-No Net 1" (none, pour order 13): -500,137.8 7905.51,137.8 7905.51,-137.8 -500,-137.8 -500,137.8
no net on Top Layer (*.GTL) "Top Layer (*.GTL)-No Net 1" (none, pour order 13): -500,-519.69 7905.51,-519.69 7905.51,-795.28 -500,-795.28 -500,-519.69
NetK1F_11 on +24V (split plane): 6999.9,2104.92 6999.9,1910.02 6530.1,1910.02 6530.1,2394.82 6999.9,2394.82
NetK1E_11 on +24V (split plane): 5599.9,2104.92 5599.9,1910.02 5130.1,1910.02 5130.1,2394.82 5599.9,2394.82
NetJ1F_13 on +24V (split plane): 7564.9,1625.02 6530.1,1625.02 6530.1,1899.82 7005,1899.82 7006.95,1900.21 7008.6,1901.32 7009.71,1902.97 7010.1,1904.92 7010.1,2099.82 7564.9,2099.82
NetJ1E_13 on +24V (split plane): 6164.9,1625.02 5130.1,1625.02 5130.1,1899.82 5605,1899.82 5606.95,1900.21 5608.6,1901.32 5609.71,1902.97 5610.1,1904.92 5610.1,2099.82 6164.9,2099.82
NetJ1D_13 on +24V (split plane): 4764.9,1625.02 3730.1,1625.02 3730.1,1899.82 4205,1899.82 4206.95,1900.21 4208.6,1901.32 4209.71,1902.97 4210.1,1904.92 4210.1,2099.82 4764.9,2099.82
NetK1D_11 on +24V (split plane): 4199.9,2104.92 4199.9,1910.02 3730.1,1910.02 3730.1,2394.82 4199.9,2394.82
NetJ1C_13 on +24V (split plane): 3364.9,1625.02 2330.1,1625.02 2330.1,1899.82 2805,1899.82 2806.95,1900.21 2808.6,1901.32 2809.71,1902.97 2810.1,1904.92 2810.1,2099.82 3364.9,2099.82
NetJ1L_13 on +24V (split plane): 7564.89,-3626.16 6530.09,-3626.16 6530.09,-3351.36 7004.99,-3351.36 7006.94,-3350.97 7008.59,-3349.86 7009.7,-3348.21 7010.09,-3346.26 7010.09,-3151.36 7564.89,-3151.36
NetK1L_11 on +24V (split plane): 6999.89,-3146.26 6999.89,-3341.16 6530.09,-3341.16 6530.09,-2856.36 6999.89,-2856.36
NetJ1K_13 on +24V (split plane): 6164.89,-3626.16 5130.09,-3626.16 5130.09,-3351.36 5604.99,-3351.36 5606.94,-3350.97 5608.59,-3349.86 5609.7,-3348.21 5610.09,-3346.26 5610.09,-3151.36 6164.89,-3151.36
NetK1K_11 on +24V (split plane): 5599.89,-3146.26 5599.89,-3341.16 5130.09,-3341.16 5130.09,-2856.36 5599.89,-2856.36
NetK1J_11 on +24V (split plane): 4199.89,-3146.26 4199.89,-3341.16 3730.09,-3341.16 3730.09,-2856.36 4199.89,-2856.36
NetJ1J_13 on +24V (split plane): 4764.89,-3626.16 3730.09,-3626.16 3730.09,-3351.36 4204.99,-3351.36 4206.94,-3350.97 4208.59,-3349.86 4209.7,-3348.21 4210.09,-3346.26 4210.09,-3151.36 4764.89,-3151.36
NetK1C_11 on +24V (split plane): 2799.9,2104.92 2799.9,1910.02 2330.1,1910.02 2330.1,2394.82 2799.9,2394.82
NetJ1B_13 on +24V (split plane): 1964.9,1625.02 930.1,1625.02 930.1,1899.82 1405,1899.82 1406.95,1900.21 1408.6,1901.32 1409.71,1902.97 1410.1,1904.92 1410.1,2099.82 1964.9,2099.82
NetK1I_11 on +24V (split plane): 2799.89,-3146.26 2799.89,-3341.16 2330.09,-3341.16 2330.09,-2856.36 2799.89,-2856.36
NetK1B_11 on +24V (split plane): 1399.9,2104.92 1399.9,1910.02 930.1,1910.02 930.1,2394.82 1399.9,2394.82
NetK1A_11 on +24V (split plane): -0.1,2104.92 -0.1,1910.02 -469.9,1910.02 -469.9,2394.82 -0.1,2394.82
NetJ1A_13 on +24V (split plane): 564.9,1625.02 -469.9,1625.02 -469.9,1899.82 5,1899.82 6.95,1900.21 8.6,1901.32 9.71,1902.97 10.1,1904.92 10.1,2099.82 564.9,2099.82
NetJ1I_13 on +24V (split plane): 3364.89,-3626.16 2330.09,-3626.16 2330.09,-3351.36 2804.99,-3351.36 2806.94,-3350.97 2808.59,-3349.86 2809.7,-3348.21 2810.09,-3346.26 2810.09,-3151.36 3364.89,-3151.36
+24V on +24V (split plane): 7879.9,-5399.98 -479.9,-5399.98 -479.9,-3632.3 -479.72,-3633.21 -478.62,-3634.86 -476.96,-3635.97 -475.01,-3636.36 569.99,-3636.36 571.94,-3635.97 573.59,-3634.86 574.7,-3633.21 575.09,-3631.26 575.09,-3146.26 574.7,-3144.31 573.59,-3142.66 571.94,-3141.55 569.99,-3141.16 10.09,-3141.16 10.09,-2851.26 9.7,-2849.31 8.59,-2847.66 6.94,-2846.55 4.99,-2846.16 -475.01,-2846.16 -476.96,-2846.55 -478.62,-2847.66 -479.72,-2849.31 -479.9,-2850.22 -479.9,1618.94 -479.71,1617.97 -478.6,1616.32 -476.95,1615.21 -475,1614.82 570,1614.82 571.95,1615.21 573.6,1616.32 574.71,1617.97 575.1,1619.92 575.1,2104.92 574.71,2106.87 573.6,2108.53 571.95,2109.63 570,2110.02 10.1,2110.02 10.1,2399.92 9.71,2401.87 8.6,2403.53 6.95,2404.63 5,2405.02 -475,2405.02 -476.95,2404.63 -478.6,2403.53 -479.71,2401.87 -479.9,2400.9 -479.9,4742.9 7879.9,4742.9
NetJ1H_13 on +24V (split plane): 1964.89,-3626.16 930.09,-3626.16 930.09,-3351.36 1404.99,-3351.36 1406.94,-3350.97 1408.59,-3349.86 1409.7,-3348.21 1410.09,-3346.26 1410.09,-3151.36 1964.89,-3151.36
NetK1H_11 on +24V (split plane): 1399.89,-3146.26 1399.89,-3341.16 930.09,-3341.16 930.09,-2856.36 1399.89,-2856.36
NetK1G_11 on +24V (split plane): -0.11,-3146.26 -0.11,-3341.16 -469.91,-3341.16 -469.91,-2856.36 -0.11,-2856.36
NetJ1G_13 on +24V (split plane): 564.89,-3626.16 -469.91,-3626.16 -469.91,-3351.36 4.99,-3351.36 6.94,-3350.97 8.59,-3349.86 9.7,-3348.21 10.09,-3346.26 10.09,-3151.36 564.89,-3151.36
RTN on RTN (split plane): 7879.9,-5399.98 -479.9,-5399.98 -479.9,4742.9 7879.9,4742.9
+12V on +12V (split plane): 7879.9,-5399.98 -479.9,-5399.98 -479.9,4742.9 7879.9,4742.9
GND on Signal GND (split plane): 7879.9,-5399.98 -479.9,-5399.98 -479.9,4742.9 7879.9,4742.9

## Keep-outs
Keep-Out Layer:
  rectangle: -500,4369.29 7885.83,4762.99
  rectangle: -500,-5420.08 7885.83,-5026.38

## Other copper
+24V (plane layer: these items are gaps in the copper):
  lines w10: -475.01,-3346.26 -475.01,-2851.26 4.99,-2851.26 4.99,-3146.26 ; -475.01,-3346.26 4.99,-3346.26 4.99,-3146.26 ; -475.01,-3346.26 -475.01,-3631.26 569.99,-3631.26 569.99,-3146.26 4.99,-3146.26 ; -475,1904.92 -475,1619.92 570,1619.92 570,2104.92 5,2104.92 ; -475,1904.92 5,1904.92 5,2104.92 ; -475,1904.92 -475,2399.92 5,2399.92 5,2104.92 ; 924.99,-3346.26 924.99,-2851.26 1404.99,-2851.26 1404.99,-3146.26 ; 924.99,-3346.26 1404.99,-3346.26 1404.99,-3146.26 ; 924.99,-3346.26 924.99,-3631.26 1969.99,-3631.26 1969.99,-3146.26 1404.99,-3146.26 ; 925,1904.92 925,2399.92 1405,2399.92 1405,2104.92 ; 925,1904.92 1405,1904.92 1405,2104.92 ; 925,1904.92 925,1619.92 1970,1619.92 1970,2104.92 1405,2104.92 ; 2324.99,-3346.26 2324.99,-2851.26 2804.99,-2851.26 2804.99,-3146.26 ; 2324.99,-3346.26 2804.99,-3346.26 2804.99,-3146.26 ; 2324.99,-3346.26 2324.99,-3631.26 3369.99,-3631.26 3369.99,-3146.26 2804.99,-3146.26 ; 2325,1904.92 2325,2399.92 2805,2399.92 2805,2104.92 ; 2325,1904.92 2805,1904.92 2805,2104.92 ; 2325,1904.92 2325,1619.92 3370,1619.92 3370,2104.92 2805,2104.92 ; 3724.99,-3346.26 3724.99,-2851.26 4204.99,-2851.26 4204.99,-3146.26 ; 3724.99,-3346.26 4204.99,-3346.26 4204.99,-3146.26 ; 3724.99,-3346.26 3724.99,-3631.26 4769.99,-3631.26 4769.99,-3146.26 4204.99,-3146.26 ; 3725,1904.92 3725,2399.92 4205,2399.92 4205,2104.92 ; 3725,1904.92 4205,1904.92 4205,2104.92 ; 3725,1904.92 3725,1619.92 4770,1619.92 4770,2104.92 4205,2104.92 ; 5124.99,-3346.26 5124.99,-2851.26 5604.99,-2851.26 5604.99,-3146.26 ; 5124.99,-3346.26 5604.99,-3346.26 5604.99,-3146.26 ; 5124.99,-3346.26 5124.99,-3631.26 6169.99,-3631.26 6169.99,-3146.26 5604.99,-3146.26 ; 5125,1904.92 5125,2399.92 5605,2399.92 5605,2104.92 ; 5125,1904.92 5605,1904.92 5605,2104.92 ; 5125,1904.92 5125,1619.92 6170,1619.92 6170,2104.92 5605,2104.92 ; 6524.99,-3346.26 6524.99,-2851.26 7004.99,-2851.26 7004.99,-3146.26 ; 6524.99,-3346.26 7004.99,-3346.26 7004.99,-3146.26 ; 6524.99,-3346.26 6524.99,-3631.26 7569.99,-3631.26 7569.99,-3146.26 7004.99,-3146.26 ; 6525,1904.92 6525,2399.92 7005,2399.92 7005,2104.92 ; 6525,1904.92 7005,1904.92 7005,2104.92 ; 6525,1904.92 6525,1619.92 7570,1619.92 7570,2104.92 7005,2104.92

## Silkscreen, mask and mechanical layers (free items; w line width, h text height)
Top Overlay:
  circle w10: c3778.41,-1988.94 r111.73
  text "SLOT 0 connector at X=19.444mm, y=196.02mm" at 11550,1019.92 h60 r90
  text "Slot6 Connector at 19.444, 62.640mm" at -940,-2410.08 h60
  text "X spacing 1.4\"" at -520,-2560.08 h60
Bottom Overlay:
  text "-12V" at 5109.84,-1858.27 h40 r270
  text "+12V" at 3182.98,-4489.08 h40
  text "+3.3V" at 3829.4,-4985.48 h40 r270
Mechanical 2:
  lines w10: -200,243 -200,1122.04 cw(c-100,1122.04) -100,1222.04 ; -199.52,242.52 ccw(c-99.52,242.52) -99.52,142.52 450,142.52 ccw(c450,242.52) 550,242.52 550,1122.52 ccw(c450,1122.52) 450,1222.52 -99.52,1222.52 ; 464.76,-1887.72 -84.76,-1887.72 cw(c-84.76,-1787.72) -184.76,-1787.72 -184.76,-907.72 cw(c-84.76,-907.72) -84.76,-807.72 464.76,-807.72 cw(c464.76,-907.72) 564.76,-907.72 ; 465.24,-1887.24 ccw(c465.24,-1787.24) 565.24,-1787.24 565.24,-908.21 ; 1210.24,253 1210.24,1132.04 cw(c1310.24,1132.04) 1310.24,1232.04 ; 1210.73,252.52 ccw(c1310.73,252.52) 1310.73,152.52 1860.24,152.52 ccw(c1860.24,252.52) 1960.24,252.52 1960.24,1132.52 ccw(c1860.24,1132.52) 1860.24,1232.52 1310.73,1232.52 ; 1844.76,-1897.72 1295.24,-1897.72 cw(c1295.24,-1797.72) 1195.24,-1797.72 1195.24,-917.72 cw(c1295.24,-917.72) 1295.24,-817.72 1844.76,-817.72 cw(c1844.76,-917.72) 1944.76,-917.72 ; 1845.24,-1897.24 ccw(c1845.24,-1797.24) 1945.24,-1797.24 1945.24,-918.21 ; 2634.76,243.25 2634.76,1122.28 cw(c2734.76,1122.28) 2734.76,1222.28 ; 2635.24,242.76 ccw(c2735.24,242.76) 2735.24,142.76 3284.76,142.76 ccw(c3284.76,242.76) 3384.76,242.76 3384.76,1122.76 ccw(c3284.76,1122.76) 3284.76,1222.76 2735.24,1222.76 ; 3994.76,253.25 3994.76,1132.28 cw(c4094.76,1132.28) 4094.76,1232.28 ; 3995.24,252.76 ccw(c4095.24,252.76) 4095.24,152.76 4644.76,152.76 ccw(c4644.76,252.76) 4744.76,252.76 4744.76,1132.76 ccw(c4644.76,1132.76) 4644.76,1232.76 4095.24,1232.76 ; 4784.76,-1897.72 4235.24,-1897.72 cw(c4235.24,-1797.72) 4135.24,-1797.72 4135.24,-917.72 cw(c4235.24,-917.72) 4235.24,-817.72 4784.76,-817.72 cw(c4784.76,-917.72) 4884.76,-917.72 ; 4785.24,-1897.24 ccw(c4785.24,-1797.24) 4885.24,-1797.24 4885.24,-918.21 ; 5394.76,263.25 5394.76,1142.28 cw(c5494.76,1142.28) 5494.76,1242.28 ; 5395.24,262.76 ccw(c5495.24,262.76) 5495.24,162.76 6044.76,162.76 ccw(c6044.76,262.76) 6144.76,262.76 6144.76,1142.76 ccw(c6044.76,1142.76) 6044.76,1242.76 5495.24,1242.76 ; 6004.76,-1887.72 5455.24,-1887.72 cw(c5455.24,-1787.72) 5355.24,-1787.72 5355.24,-907.72 cw(c5455.24,-907.72) 5455.24,-807.72 6004.76,-807.72 cw(c6004.76,-907.72) 6104.76,-907.72 ; 6005.24,-1887.24 ccw(c6005.24,-1787.24) 6105.24,-1787.24 6105.24,-908.21 ; 6734.76,253.25 6734.76,1132.28 cw(c6834.76,1132.28) 6834.76,1232.28 ; 6735.24,252.76 ccw(c6835.24,252.76) 6835.24,152.76 7384.76,152.76 ccw(c7384.76,252.76) 7484.76,252.76 7484.76,1132.76 ccw(c7384.76,1132.76) 7384.76,1232.76 6835.24,1232.76 ; 7394.76,-1877.72 6845.24,-1877.72 cw(c6845.24,-1777.72) 6745.24,-1777.72 6745.24,-897.72 cw(c6845.24,-897.72) 6845.24,-797.72 7394.76,-797.72 cw(c7394.76,-897.72) 7494.76,-897.72 ; 7395.24,-1877.24 ccw(c7395.24,-1777.24) 7495.24,-1777.24 7495.24,-898.21 ; 8560,-2327.48 ccw(c8660,-2327.48) 8660,-2427.48 8810,-2427.48 ccw(c8810,-2327.48) 8910,-2327.48 8910,-1577.48 ccw(c8810,-1577.48) 8810,-1477.48 8660,-1477.48 ccw(c8660,-1577.48) 8560,-1577.48 8560,-2327.48
  lines w39.37: 7900,4752.99 7900,-5420.08 -500,-5420.08 -500,4762.99 7900,4762.99
Mechanical 15:
  rectangle: -500,-840.55 7900,183.07

## Dimensions
-500,-5420.08 to -500,4762.99 on Mechanical 2
-500,-5420.08 to 7900,-5420.08 on Mechanical 2

## Text inside footprints (layer, text, board x,y; h text height)
J1A: Top Overlay "16" at 555.51,2847.24 h40; Top Overlay "1" at -14.49,2177.24 h40; Top Overlay "13" at 560.51,1717.24 h40; Top Overlay "4" at 560.51,2177.24 h40; Top Overlay "12" at 555.51,2382.24 h40; Top Overlay "14" at 560.51,1952.24 h40; Top Overlay "15" at 555.51,2607.24 h40
J1B: Top Overlay "16" at 1955.51,2847.24 h40; Top Overlay "1" at 1385.51,2177.24 h40; Top Overlay "13" at 1960.51,1717.24 h40; Top Overlay "4" at 1960.51,2177.24 h40; Top Overlay "12" at 1955.51,2382.24 h40; Top Overlay "14" at 1960.51,1952.24 h40; Top Overlay "15" at 1955.51,2607.24 h40
J1C: Top Overlay "16" at 3355.51,2847.24 h40; Top Overlay "1" at 2785.51,2177.24 h40; Top Overlay "13" at 3360.51,1717.24 h40; Top Overlay "4" at 3360.51,2177.24 h40; Top Overlay "12" at 3355.51,2382.24 h40; Top Overlay "14" at 3360.51,1952.24 h40; Top Overlay "15" at 3355.51,2607.24 h40
J1D: Top Overlay "16" at 4755.51,2847.24 h40; Top Overlay "1" at 4185.51,2177.24 h40; Top Overlay "13" at 4760.51,1717.24 h40; Top Overlay "4" at 4760.51,2177.24 h40; Top Overlay "12" at 4755.51,2382.24 h40; Top Overlay "14" at 4760.51,1952.24 h40; Top Overlay "15" at 4755.51,2607.24 h40
J1E: Top Overlay "16" at 6155.51,2847.24 h40; Top Overlay "1" at 5585.51,2177.24 h40; Top Overlay "13" at 6160.51,1717.24 h40; Top Overlay "4" at 6160.51,2177.24 h40; Top Overlay "12" at 6155.51,2382.24 h40; Top Overlay "14" at 6160.51,1952.24 h40; Top Overlay "15" at 6155.51,2607.24 h40
J1F: Top Overlay "16" at 7555.51,2847.24 h40; Top Overlay "1" at 6985.51,2177.24 h40; Top Overlay "13" at 7560.51,1717.24 h40; Top Overlay "4" at 7560.51,2177.24 h40; Top Overlay "12" at 7555.51,2382.24 h40; Top Overlay "14" at 7560.51,1952.24 h40; Top Overlay "15" at 7555.51,2607.24 h40
J1G: Top Overlay "16" at 555.5,-2403.94 h40; Top Overlay "1" at -14.5,-3073.94 h40; Top Overlay "13" at 560.5,-3533.94 h40; Top Overlay "4" at 560.5,-3073.94 h40; Top Overlay "12" at 555.5,-2868.94 h40; Top Overlay "14" at 560.5,-3298.94 h40; Top Overlay "15" at 555.5,-2643.94 h40
J1H: Top Overlay "16" at 1955.5,-2403.94 h40; Top Overlay "1" at 1385.5,-3073.94 h40; Top Overlay "13" at 1960.5,-3533.94 h40; Top Overlay "4" at 1960.5,-3073.94 h40; Top Overlay "12" at 1955.5,-2868.94 h40; Top Overlay "14" at 1960.5,-3298.94 h40; Top Overlay "15" at 1955.5,-2643.94 h40
J1I: Top Overlay "16" at 3355.5,-2403.94 h40; Top Overlay "1" at 2785.5,-3073.94 h40; Top Overlay "13" at 3360.5,-3533.94 h40; Top Overlay "4" at 3360.5,-3073.94 h40; Top Overlay "12" at 3355.5,-2868.94 h40; Top Overlay "14" at 3360.5,-3298.94 h40; Top Overlay "15" at 3355.5,-2643.94 h40
J1J: Top Overlay "16" at 4755.5,-2403.94 h40; Top Overlay "1" at 4185.5,-3073.94 h40; Top Overlay "13" at 4760.5,-3533.94 h40; Top Overlay "4" at 4760.5,-3073.94 h40; Top Overlay "12" at 4755.5,-2868.94 h40; Top Overlay "14" at 4760.5,-3298.94 h40; Top Overlay "15" at 4755.5,-2643.94 h40
J1K: Top Overlay "16" at 6155.5,-2403.94 h40; Top Overlay "1" at 5585.5,-3073.94 h40; Top Overlay "13" at 6160.5,-3533.94 h40; Top Overlay "4" at 6160.5,-3073.94 h40; Top Overlay "12" at 6155.5,-2868.94 h40; Top Overlay "14" at 6160.5,-3298.94 h40; Top Overlay "15" at 6155.5,-2643.94 h40
J1L: Top Overlay "16" at 7555.5,-2403.94 h40; Top Overlay "1" at 6985.5,-3073.94 h40; Top Overlay "13" at 7560.5,-3533.94 h40; Top Overlay "4" at 7560.5,-3073.94 h40; Top Overlay "12" at 7555.5,-2868.94 h40; Top Overlay "14" at 7560.5,-3298.94 h40; Top Overlay "15" at 7555.5,-2643.94 h40
J2: Bottom Overlay "13" at 8742,-4430.08 h50; Bottom Overlay "14" at 8742,-4330.08 h50; Bottom Overlay "1" at 9542,-4430.08 h50; Bottom Overlay "2" at 9542,-4330.08 h50
P2: Bottom Overlay "1" at 6260,187.52 h40 r270
U5: Bottom Overlay "A1" at 2439.83,-532.24 h50 r270; Bottom Overlay "B1" at 3227.23,-532.24 h50 r270